# Altium PCB Copy of SoM.PcbDoc (part 7 of 8)
Units mm, origin at the board's own origin, x right, y up, seen from the top; angles counter-clockwise.
Board outline 69.6 x 50 mm, 10 copper layers ([1] Signal HS-H, [2] GND, [3] Signal HS-V, [4] Signal H, [5] GND, [6] POWER, [7] Signal V, [8] Signal HS-H, [9] GND, [10] Signal HS-V), stack 1.146 mm thick; 537 components, 516 nets, 5689 pads, 981 vias.
Unrouted connection lines stored in the file: 963.
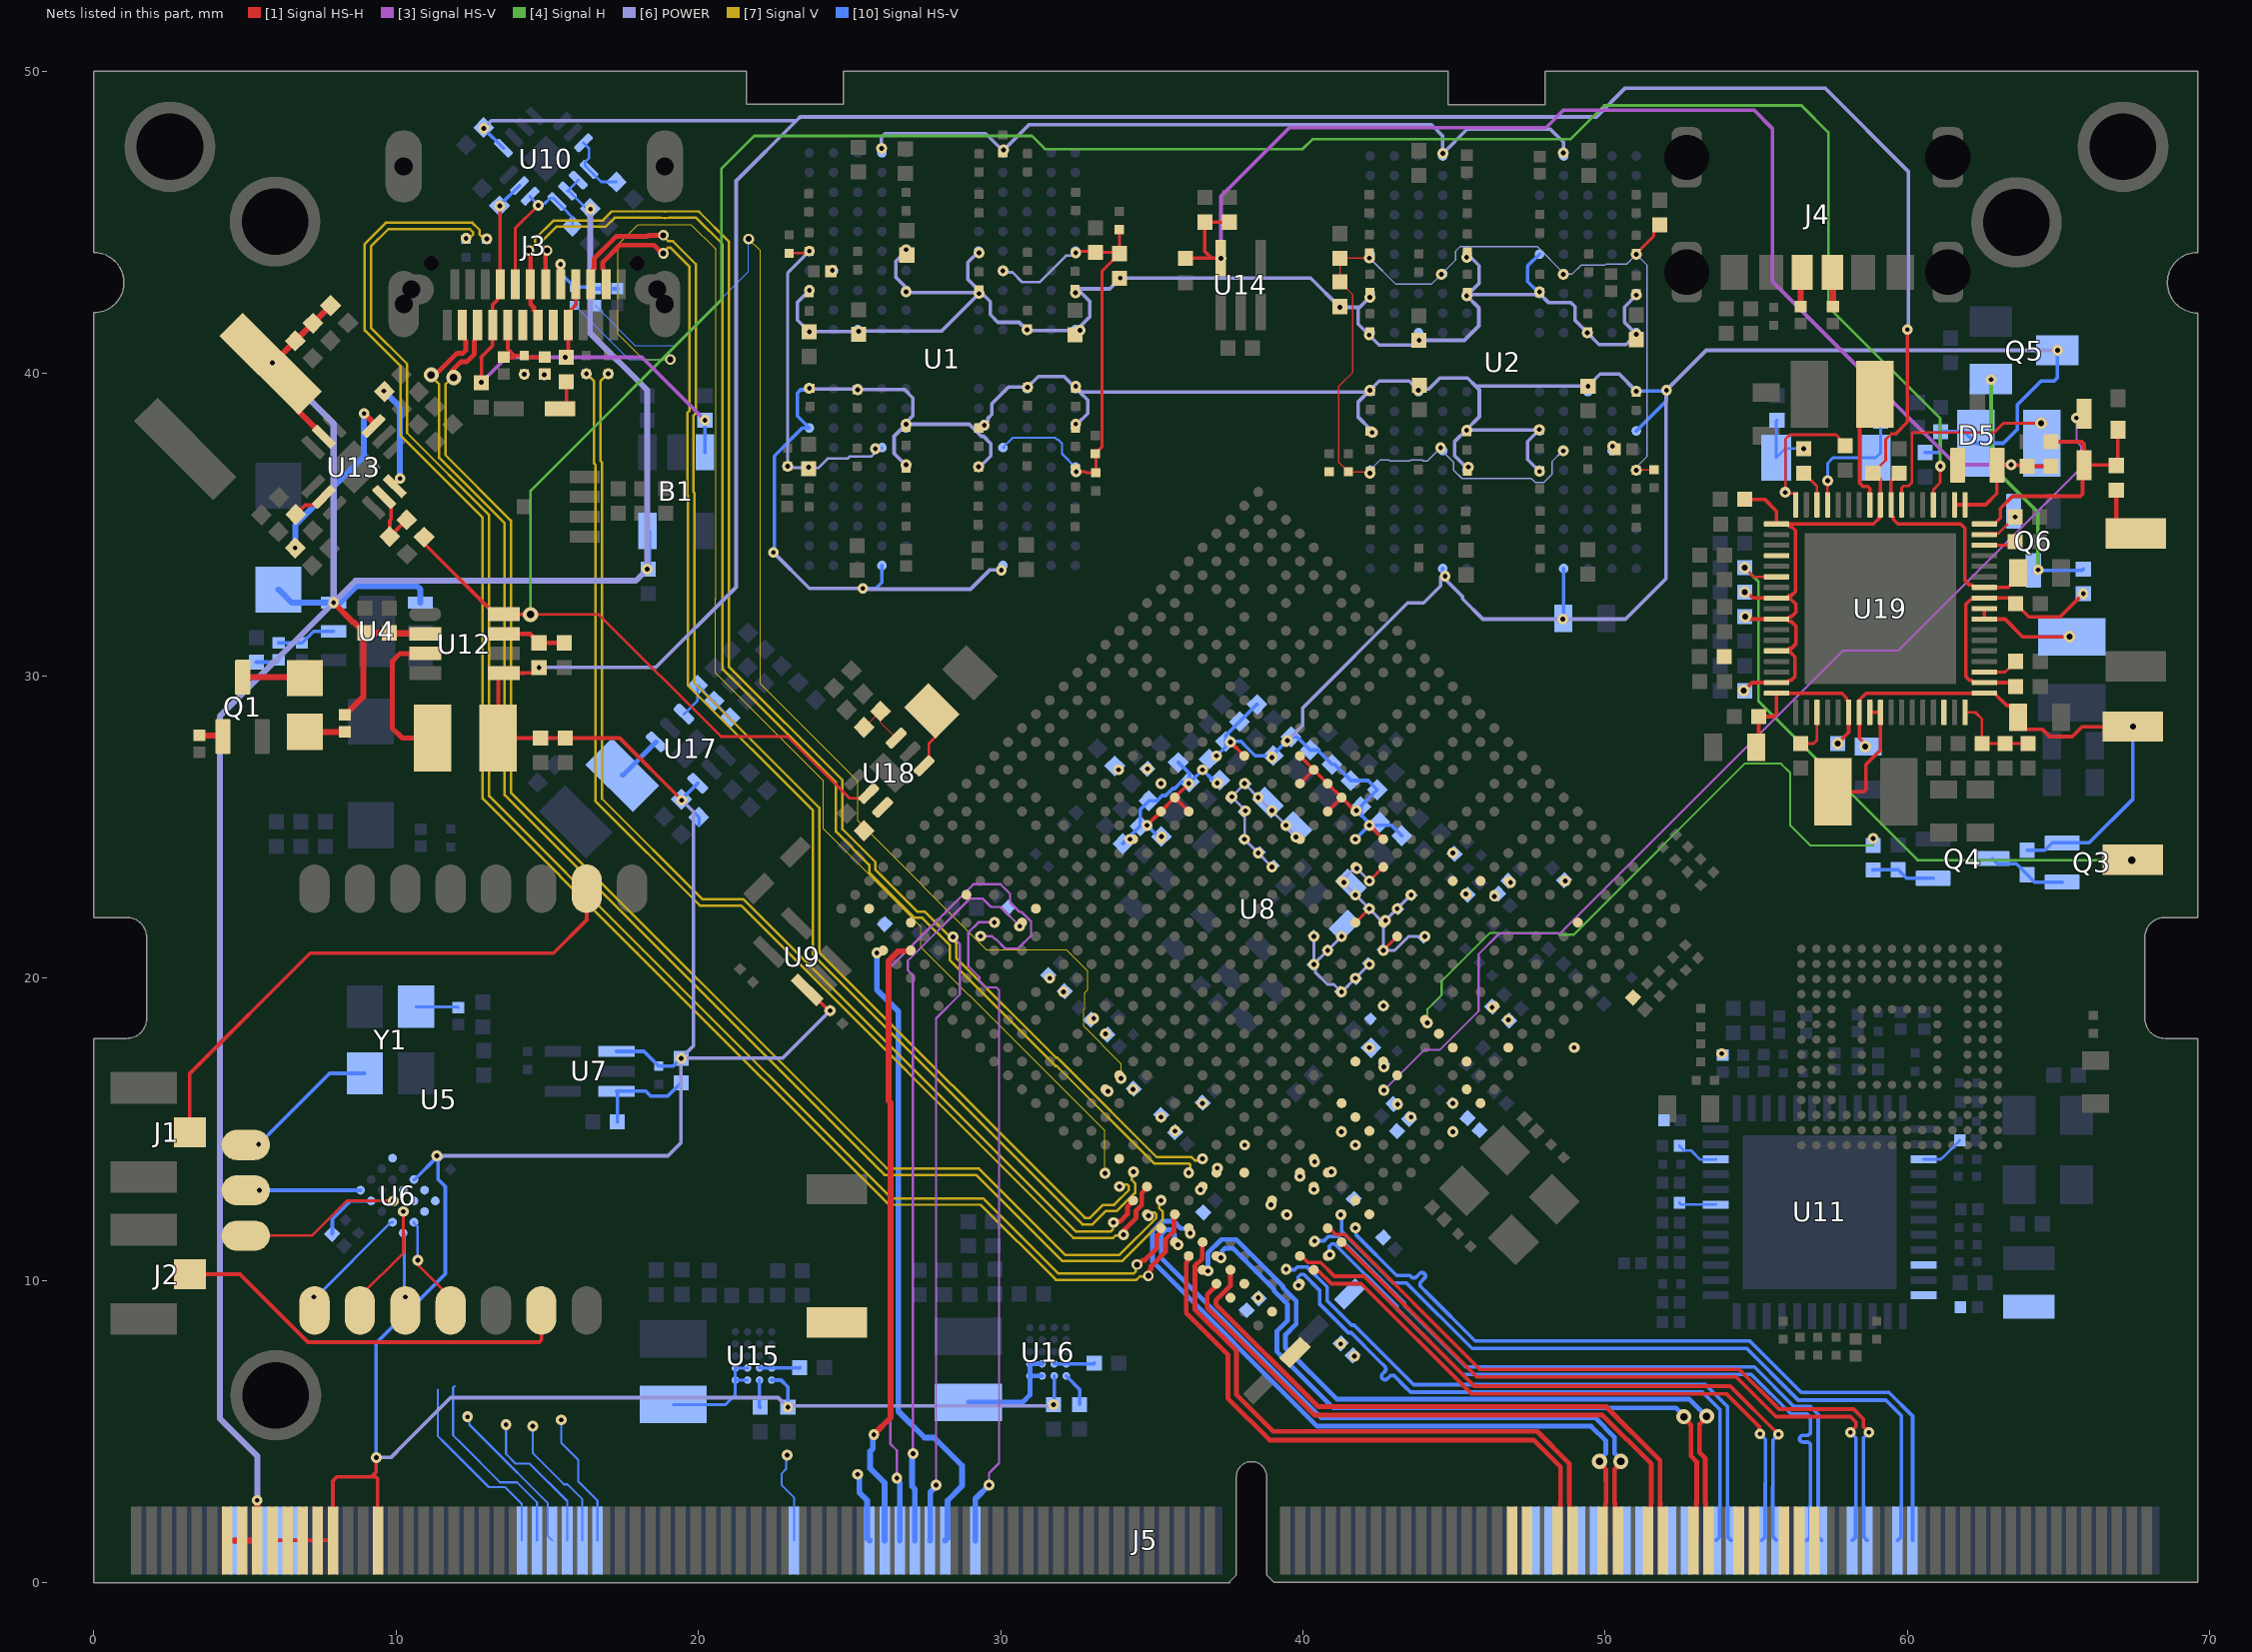
[diagram p12: the nets of this part, all layers, seen from the top]

## Via types
v1: diameter 0.36, hole 0.16, [1] Signal HS-H to [10] Signal HS-V, 895 vias
v2: diameter 0.35, hole 0.16, [1] Signal HS-H to [10] Signal HS-V, 22 vias
v3: diameter 0.4, hole 0.2, [1] Signal HS-H to [10] Signal HS-V, 13 vias
v4: diameter 0.35, hole 0.15, [1] Signal HS-H to [10] Signal HS-V, 12 vias
v5: diameter 0.35, hole 0.15, [1] Signal HS-H to [8] Signal HS-H, 11 vias
v6: diameter 0.35, hole 0.2, [1] Signal HS-H to [8] Signal HS-H, 6 vias
v7: diameter 0.5, hole 0.25, [1] Signal HS-H to [10] Signal HS-V, 6 vias
v8: diameter 0.35, hole 0.15, [3] Signal HS-V to [10] Signal HS-V, 6 vias
v9: diameter 0.35, hole 0.2, [3] Signal HS-V to [10] Signal HS-V, 4 vias
v10: diameter 0.36, hole 0.16, [1] Signal HS-H to [3] Signal HS-V, 4 vias
v11: diameter 0.5, hole 0.25, [1] Signal HS-H to [8] Signal HS-H, 2 vias

## Nets (pads, with @x,y where several pads share a name; then routed paths per layer and width w, separated by ;. In a path a pad name is that pad's centre, name@x,y a point inside that pad or via, vN(x,y) a via of type N, cw(c..) or ccw(c..) an arc to the next point about the centre after c; other vN are vias at no path point) (continued)
NetC328_1: C328.1 U19.37 | length 1.2
  [1] Signal HS-H w0.09: U19.37@62.537,30.124 63.22,30.124 C328.1@63.576,30.48
NetC341_1: C341.1 U19.65 Y4.2 | length 4.3
  [1] Signal HS-H w0.09: U19.65@57.352,35.66 v1(57.353,36.449)
  [10] Signal HS-V w0.09: v1(57.353,36.449) 57.353,37.033 57.531,37.211 Y4.2@58.946,37.211 59.106,37.371 C341.1@59.106,38.43
NetC343_1: C343.1 R123.2 Y4.1 | length 2.3
  [10] Signal HS-V w0.09: C343.1@55.677,38.456 55.65,38.429 Y4.1@55.65,37.211 55.955,37.516 v1(56.566,37.516)
NetD2_K: D2.K R36.1 U8.AK30
  other v1: 38.52,9.427
NetD3_K: D3.K R38.1 U8.AK31
  other v1: 41.25,7.899
NetDS1_A: DS1.A R92.1 | length 1.3
  [1] Signal HS-H w0.2: DS1.A@6.985,28.143 R92.1@8.306,28.143
NetDS1_K: DS1.K Q1.3 | length 2.1
  [1] Signal HS-H w0.2: Q1.3@4.928,29.954 6.952,29.954 DS1.K@6.985,29.921
NetJ1_2: J1.2 U5.9 | length 18.2
  [1] Signal HS-H w0.12: J1.2@3.183,14.897 3.183,16.848 7.163,20.828 15.215,20.828 16.309,21.922 U5.9@16.309,22.955
NetJ2_2: J2.2 U5.6 | length 13.6
  [1] Signal HS-H w0.12: J2.2@3.183,10.203 4.84,10.203 7.088,7.955 14.739,7.955 14.809,8.025 U5.6@14.809,9.005
NetJ4_A5: J4.A5 R101.2 | length 1.1
  [1] Signal HS-H w0.2: J4.A5@57.513,43.35 57.531,43.332 R101.2@57.531,42.215
NetJ4_B5: J4.B5 R102.2 | length 1.2
  [1] Signal HS-H w0.2: R102.2@56.464,42.215 56.464,43.301 J4.B5@56.513,43.35
NetL1_1: L1.1 U11.48
NetL2_1: L2.1 U12.3 | length 4.9
  [1] Signal HS-H w0.16: U12.3@10.968,30.739 10.14,30.739 9.881,30.48 9.881,28.27 10.211,27.94 L2.1@11.204,27.94
NetL4_1: L4.1 U15.D3 U15.D4 U15.E3 U15.E4 | length 3.9
  [10] Signal HS-V w0.1: L4.1@19.176,5.889 20.901,5.889 21.228,6.217 U15.E4@21.228,6.701 ; U15.E3@21.628,6.701 U15.E4@21.228,6.701 ; U15.D3@21.628,7.101 U15.D4@21.228,7.101 U15.E4@21.228,6.701
NetL5_1: L5.1 U16.D3 U16.D4 U16.E3 U16.E4 | length 4
  [10] Signal HS-V w0.16: L5.1@28.931,5.971 30.736,5.971 30.972,6.207 U16.E4@30.972,6.839 ; U16.E3@31.372,6.839 U16.E4@30.972,6.839 ; U16.D3@31.372,7.239 U16.D4@30.972,7.239 U16.E4@30.972,6.839
NetL6_1: L6.1 U17.4 | length 1.6
  [10] Signal HS-V w0.16: L6.1@17.488,26.715 17.506,26.715 U17.4@18.608,27.817
NetL7_1: L7.1 U18.4 | length 2
  [1] Signal HS-H w0.09: U18.4@27.467,27.021 27.626,27.18 27.626,27.762 27.848,27.984 27.848,28.727 L7.1@27.731,28.843
NetL8_1: L8.1 U19.61 | length 4.1
  [1] Signal HS-H w0.12: U19.61@58.752,35.659 58.752,36.196 58.681,36.266 58.524,36.266 58.415,36.376 58.415,38.808 L8.1@58.926,39.319
NetL9_2: L9.2 U19.42 U19.43 | length 3.4
  [1] Signal HS-H w0.12: U19.43@62.537,32.224 U19.42@62.537,31.874 63.224,31.874 63.805,31.293 v3(65.354,31.293)
NetL10_1: L10.1 U19.58 | length 7
  [1] Signal HS-H w0.09: U19.58@59.802,35.659 59.802,36.214 59.869,36.281 60.037,36.281 60.137,36.382 60.137,37.996 60.19,38.049 62.861,38.049 63.166,38.354 v3(64.414,38.354)
NetL11_2: L11.2 U19.25 U19.26 | length 4.2
  [1] Signal HS-H w0.12: L11.2@57.533,26.162 58.553,26.162 58.623,26.232 58.623,27.066 59.102,27.545 U19.26@59.102,28.789 U19.25@58.752,28.789
NetQ1_1: Q1.1 R93.2 | length 0.8
  [1] Signal HS-H w0.2: R93.2@3.506,28.025 4.246,28.025 Q1.1@4.278,27.994
NetQ3_1: Q3.1 Q4.3 R111.2 | length 2.6
  [10] Signal HS-V w0.12: Q4.3@62.804,23.952 62.976,23.78 63.596,23.78 R111.2@63.957,23.419 64.201,23.175 Q3.1@65.111,23.175
NetQ4_1: Q4.1 R113.2 R115.2 | length 2.1
  [10] Signal HS-V w0.12: R113.2@58.861,23.576 58.869,23.584 R115.2@59.686,23.584 59.968,23.302 Q4.1@60.844,23.302
NetQ5_1: Q5.1 Q6.3 R130.2 | length 8.6
  [4] Signal H w0.12: v1(62.763,39.802) 62.763,36.957 64.313,35.408 v1(64.313,33.503)
  [10] Signal HS-V w0.12: Q6.3@64.16,33.488 65.771,33.488 R130.2@65.811,33.528
NetR11_1: R11.1 R12.2 U4.5 | length 2
  [10] Signal HS-V w0.12: R12.2@6.121,31.09 R11.1@6.883,31.09 6.893,31.09 7.274,31.471 U4.5@7.938,31.471
NetR12_1: R12.1 R13.1 | length 0.8
  [10] Signal HS-V w0.12: R13.1@5.385,30.455 6.046,30.455 R12.1@6.121,30.53
NetR14_1: R14.1 Y1.1 | length 1.4
  [10] Signal HS-V w0.09: Y1.1@10.668,19.05 12.04,19.05 R14.1@12.065,19.025
NetR15_2: R15.2 U6.D4 | length 2
  [10] Signal HS-V w0.12: R15.2@7.89,11.541 7.897,11.548 7.897,12.03 8.497,12.63 U6.D4@9.18,12.63
NetR16_1: R16.1 R17.2 U7.3 | length 3.4
  [10] Signal HS-V w0.12: R17.2@17.323,15.24 17.323,16.231 U7.3@17.297,16.256 18.267,16.256 18.428,16.095 18.991,16.095 R16.1@19.431,16.535
NetR24_1: R24.1 U8.V29
  other v1: 43.576,15.402
NetR25_1: R25.1 U8.L28
  other v1: 46.257,19.028
NetR26_2: R26.2 U8.L29
  other v1: 46.793,18.619
NetR28_1: R28.1 U8.AF15
  other v1: 33.464,18.159
NetR29_1: R29.1 U8.G21
  other v1: 44.955,24.135
NetR31_1: R31.1 U8.AF12
  other v1: 32.085,19.538
NetR32_1: R32.1 U8.AG18
  other v1: 34.384,16.321
NetR33_1: R33.1 U8.AE21
  other v1: 36.682,15.861
NetR34_1: R34.1 U8.AG21
  other v1: 35.762,14.942
NetR35_1: R35.1 U8.AG20
  other v1: 35.303,15.402
NetR37_1: R37.1 U8.AC31
NetR39_1: R39.1 U8.AC30
NetR40_1: R40.1 U8.AF14
  other v1: 33.081,18.67
NetR41_1: R41.1 U8.AF11
  other v1: 31.626,19.998
NetR46_1: R46.1 U8.F24
  other v1: 46.869,23.164
NetR49_2: R49.2 U8.H23
  other v1: 45.389,22.781
NetR50_1: R50.1 U8.D26
  other v1: 48.683,23.215
NetR51_2: R51.2 U8.G23
NetR54_1: R54.1 U8.G24
  other v2: 46.334,22.705
NetR55_2: R55.2 U8.H22
  other v1: 53.848,17.501 48.969,17.702
NetR56_1: R56.1 U8.E28
NetR74_2: R74.2 U11.46
NetR75_2: R75.2 U11.39 | length 1.5
  [10] Signal HS-V w0.09: U11.39@60.529,14.007 61.099,14.007 61.163,14.072 61.173,14.072 61.721,14.62 R75.2@61.721,14.63
NetR76_2: R76.2 U11.19 | length 1.2
  [10] Signal HS-V w0.09: R76.2@52.452,12.573 52.517,12.507 U11.19@53.659,12.507
NetR79_2: R79.2 U11.22 | length 1.4
  [10] Signal HS-V w0.09: R79.2@52.452,14.453 52.452,14.443 52.597,14.298 52.835,14.298 53.137,13.995 53.647,13.995 U11.22@53.659,14.007
NetR94_1: R94.1 R95.2 U12.7 | length 2.1
  [1] Signal HS-H w0.16: U12.7@13.568,31.389 14.432,31.389 R94.1@14.732,31.09 R95.2@15.57,31.09
NetR96_1: R96.1 U13.8 | length 1.2
  [1] Signal HS-H w0.12: R96.1@6.688,35.339 6.992,35.643 7.239,35.643 7.511,35.915 U13.8@7.617,35.915
NetR98_1: R98.1 U13.12 | length 3.1
  [10] Signal HS-V w0.2: v1(9.601,39.421) 10.135,38.887 v4(10.135,36.525)
NetR100_2: R100.2 R103.2 U13.11 | length 2.2
  [1] Signal HS-H w0.12: U13.11@9.611,35.915 9.611,35.809 9.841,35.58 9.841,35.175 9.796,35.131 R103.2@9.796,34.603 R100.2@10.355,35.162
NetR104_2: R104.2 U13.3 | length 6
  [1] Signal HS-H w0.2: v4(8.941,38.684) 9.285,38.34 9.285,38.29 U13.3@9.258,38.263
  [10] Signal HS-V w0.2: v4(6.672,34.231) 6.672,34.995 8.941,37.263 v4(8.941,38.684)
NetR110_1: R110.1 R114.2 R118.2 U17.6 | length 2.7
  [10] Signal HS-V w0.09: U17.6@19.527,28.737 19.977,29.186 R110.1@19.977,29.689 20.499,29.166 R114.2@20.521,29.166 20.521,29.135 R118.2@21.048,28.608
NetR112_1: R112.1 R116.2 U18.6 | length 1.9
  [1] Signal HS-H w0.002: R116.2@25.483,28.299 25.497,28.299 R112.1@26.027,28.829 26.027,28.46 U18.6@26.548,27.94
NetR123_1: R123.1 U19.66 | length 1.2
  [1] Signal HS-H w0.09: R123.1@56.566,36.703 57.002,36.267 U19.66@57.002,35.659
NetR127_1: R127.1 R129.1 R131.2 U19.34 | length 3
  [1] Signal HS-H w0.09: U19.34@61.902,28.789 62.122,28.789 62.125,28.792 62.242,28.792 62.459,28.575 R127.1@62.459,27.762 R131.2@63.221,27.762 R129.1@63.984,27.763
NetU19_4: U19.4 U19.32
OTP_OUT_H: R113.1 U8.P26 | length 21.4
  [4] Signal H w0.07: v1(44.12,18.517) 44.12,18.973 44.586,19.439 44.586,19.897 46.177,21.488 48.438,21.488 48.489,21.438 48.959,21.438 54.623,27.102 55.804,27.102 55.829,27.077 56.117,26.789 56.117,25.061 56.79,24.388 58.861,24.388
  [10] Signal HS-V w0.07: R113.1@58.861,24.388 v1@58.861,24.744
  other v1: 58.861,24.617
PCIE_REF_CLK_N: J5.226 U8.AD30 | length 25.8
  [10] Signal HS-V w0.122: v1(41.25,12.167) 41.284,12.132 41.284,11.624 42.999,9.909 43.431,9.909 45.594,7.747 54.675,7.747 56.236,6.187 56.381,6.041 59.282,6.041 59.79,5.533 59.79,2.532 59.779,2.521 59.779,1.511 J5.226@59.665,1.397
PCIE_REF_CLK_P: J5.228 U8.AD31 | length 25.8
  [10] Signal HS-V w0.122: v1(41.732,11.735) 41.764,11.703 41.764,11.497 43.102,10.159 43.534,10.159 43.578,10.116 ccw(c43.664,10.202) 43.751,10.116 43.861,10.225 cw(c43.939,10.147) 44.018,10.068 43.908,9.958 ccw(c43.994,9.872) 43.908,9.785 44.131,9.562 45.697,7.996 54.778,7.996 56.484,6.29 59.385,6.29 60.165,5.51 60.165,4.597 J5.228@60.165,1.397
PCIE_RX0_N: J5.214 U8.AF31 | length 23.3
  [10] Signal HS-V w0.122: v1(40.894,10.846) 40.876,10.863 40.876,11.134 40.948,11.206 41.049,11.206 43.109,9.147 43.109,9.064 45.284,6.889 54.828,6.889 56.138,5.579 56.236,5.579 56.676,5.579 56.79,5.466 56.79,5.279 56.79,4.996 cw(c56.668,4.996) 56.668,4.874 56.541,4.874 ccw(c56.541,4.762) 56.541,4.651 56.668,4.651 cw(c56.668,4.529) 56.79,4.529 56.79,3.961 56.79,2.532 56.779,2.521 56.779,1.511 J5.214@56.665,1.397
PCIE_RX0_P: J5.216 U8.AF30 | length 23.4
  [10] Signal HS-V w0.122: v1(40.386,11.303) 40.394,11.311 40.7,11.311 40.845,11.455 41.153,11.455 43.358,9.25 43.358,9.167 45.387,7.138 54.932,7.138 56.236,5.834 56.241,5.829 56.78,5.829 57.04,5.569 57.04,5.279 57.04,2.532 57.051,2.521 57.051,1.511 J5.216@57.165,1.397
PCIE_RX1_N: J5.202 U8.AH31 | length 21.2
  [10] Signal HS-V w0.122: v1(39.853,9.83) 39.84,9.842 39.84,10.111 39.927,10.198 40.028,10.198 40.549,9.678 40.549,9.224 41.506,8.268 41.593,8.268 42.507,7.353 42.707,7.153 cw(c42.621,7.066) 42.707,6.98 42.632,6.905 ccw(c42.711,6.826) 42.632,6.748 ccw(c42.711,6.826) 42.79,6.748 42.865,6.823 cw(c42.951,6.736) 43.038,6.823 43.373,6.487 43.561,6.299 53.213,6.299 53.79,5.722 53.79,2.532 53.779,2.521 53.779,1.511 J5.202@53.665,1.397
PCIE_RX1_P: J5.204 U8.AH30 | length 21.3
  [10] Signal HS-V w0.122: v1(39.446,10.363) 39.458,10.351 39.728,10.351 39.824,10.447 40.132,10.447 40.798,9.781 40.798,9.328 41.609,8.517 41.696,8.517 43.664,6.549 53.316,6.549 54.04,5.825 54.04,2.532 54.051,2.521 54.051,1.511 J5.204@54.165,1.397
PCIE_RX2_N: J5.190 U8.AC28
  other v1: 40.945,13.589
PCIE_RX2_P: J5.192 U8.AC27
  other v1: 40.386,13.919
PCIE_RX3_N: J5.178 U8.AF28
  other v1: 39.472,12.167
PCIE_RX3_P: J5.180 U8.AF27
  other v1: 38.938,12.497
PCIE_TX0_N: J5.220 U8.AE31 | length 23.6
  [1] Signal HS-H w0.122: U8.AE31@41.278,11.265 41.29,11.265 45.748,6.807 54.331,6.807 55.646,5.492 56.236,5.492 58.109,5.492 58.29,5.31 58.29,5.164 58.115,4.989 v4(58.115,4.978)
  [10] Signal HS-V w0.122: v4(58.115,4.978) 58.115,4.968 58.29,4.793 58.29,3.12 58.29,2.532 58.279,2.521 58.279,1.511 J5.220@58.165,1.397
PCIE_TX0_P: J5.222 U8.AE30 | length 24.5
  [1] Signal HS-H w0.122: U8.AE30@40.818,11.725 40.874,11.725 41.085,11.514 41.394,11.514 45.852,7.057 54.434,7.057 55.75,5.741 56.236,5.741 58.212,5.741 58.54,5.413 58.54,5.164 58.715,4.989 v4(58.715,4.978)
  [10] Signal HS-V w0.122: J5.222@58.665,1.397 58.551,1.511 58.551,2.521 58.54,2.532 58.54,3.223 58.54,4.793 58.715,4.968 v4(58.715,4.978)
PCIE_TX1_N: J5.208 U8.AG31 | length 20.8
  [1] Signal HS-H w0.122: U8.AG31@40.359,10.346 40.398,10.306 40.522,10.306 40.937,9.891 41.925,9.891 45.568,6.248 54,6.248 55.088,5.16 55.088,4.957 v4(55.118,4.928)
  [10] Signal HS-V w0.122: v4(55.118,4.928) 55.118,4.922 55.298,4.742 55.298,3.285 55.29,3.277 55.29,2.532 55.279,2.521 55.279,1.511 J5.208@55.165,1.397
PCIE_TX1_P: J5.210 U8.AG30 | length 21.9
  [1] Signal HS-H w0.122: U8.AG30@39.899,10.806 39.955,10.806 40.166,10.595 40.586,10.595 41.041,10.14 42.028,10.14 45.671,6.498 54.132,6.498 v4(55.728,4.902)
  [10] Signal HS-V w0.122: J5.210@55.665,1.397 55.551,1.511 55.551,2.521 55.54,2.532 55.54,3.173 55.547,3.181 55.547,4.717 55.728,4.897 v4(55.728,4.902)
PCIE_TX2_N: J5.196 U8.AA28
  other v1: 41.732,14.478
PCIE_TX2_P: J5.198 U8.AA27
  other v1: 41.275,14.91
PCIE_TX3_N: J5.184 U8.AD28
  other v1: 40.361,13.005
PCIE_TX3_P: J5.186 U8.AD27
  other v1: 39.903,13.437
PMIC_EXT_EN: R100.1 U12.8 U18.2 U19.55 | length 88
  [1] Signal HS-H w0.09: v7(14.453,32.029) 16.713,32.029 20.752,27.991 22.963,27.991 25.004,25.949 25.476,25.949 U18.2@25.635,26.108 ; U19.55@60.852,35.659 60.852,36.163 61.077,36.388 v5(61.077,36.933)
  [1] Signal HS-H w0.12: R100.1@10.93,34.587 10.93,34.377 13.268,32.039 U12.8@13.568,32.039 13.578,32.029 v7(14.453,32.029)
  [4] Signal H w0.09: v7(14.453,32.029) 14.453,36.128 20.77,42.445 20.77,46.779 21.847,47.857 31.033,47.857 31.466,47.424 39.991,47.424 40.317,47.75 48.842,47.75 49.962,48.87 56.49,48.87 57.379,47.981 57.379,42.212 61.087,38.503 61.077,38.494 v5(61.077,36.933)
PMIC_INT_L: C344.2 U8.M30 U19.49 | length 1.1
  [1] Signal HS-H w0.09: U19.49@62.537,34.324 63.432,34.324 C344.2@63.551,34.442
PMIC_SLEEP_H: C345.2 Q6.1 U8.R30 U19.50 | length 1.3
  [1] Signal HS-H w0.09: U19.50@62.537,34.674 62.577,34.714 63.009,34.714 v1(63.551,35.255)
PWM0_BL: J5.88 U8.AF5 | length 3.1
  [10] Signal HS-V w0.07: v1(22.936,4.216) 22.904,4.184 22.904,3.756 22.76,3.612 22.76,3.224 23.165,2.819 J5.88@23.165,1.397
PWR_KEY: J5.14 R128.1 SW3.2 | length 1.8
  [1] Signal HS-H w0.16: R128.1@66.904,36.144 66.904,35.133 67.324,34.713 SW3.2@67.548,34.713
PWR_KEY_L: D6.A U8.V27 | length 34.7
  [1] Signal HS-H w0.12: v5(65.586,38.532) 65.698,38.532 D6.A@65.837,38.671
  [3] Signal HS-V w0.07: v1(42.672,16.281) 44.01,17.62 44.517,17.62 45.809,18.912 45.809,20.789 46.496,21.475 48.501,21.475 57.861,30.836 59.69,30.836 65.735,36.881 65.735,37.6 65.586,37.75 v5(65.586,38.532)
PWROM: D6.K D7.K R125.1 R128.2 U19.51 | length 8.9
  [1] Signal HS-H w0.12: U19.51@62.537,35.024 62.872,35.024 63.066,35.218 63.066,35.535 63.472,35.941 65.716,35.941 65.786,36.011 65.786,36.92 D6.K@65.837,36.971 ; R125.1@64.745,37.744 65.761,37.744 65.837,37.668 D6.K@65.837,36.971 ; D7.K@66.954,38.138 66.954,37.008 R128.2@66.904,36.957 66.89,36.971 D6.K@65.837,36.971
R7_U8E: R19.2 U8.R7
  other v1: 34.854,26.925
R8_U8E: FB3.1 U8.R8
  other v1: 35.303,26.433 33.902,26.891
R24_RK3399: C181.2 C182.2 FB7.1 U8.R24 U8.U25
  other v1: 42.197,17.7 42.657,19.079
RECOVERY: J5.20 R27.2 SW2.2
RESET_IN_H: C346.2 J5.22 Q3.3 SW1.2 U19.6 | length 20.3
  [1] Signal HS-H w0.09: v3(54.61,33.572) 54.909,33.274 U19.6@55.667,33.274
  [4] Signal H w0.09: v3(54.61,33.572) 55.067,33.115 55.067,29.159 60.325,23.901 v7(67.412,23.901)
RespWROM: R22.1 R124.1 U19.20 | length 1.5
  [1] Signal HS-H w0.09: R124.1@56.464,27.762 56.896,27.762 57.002,27.868 U19.20@57.002,28.789
RTC_BATT_IN: D5.A1 J5.18
RTC_CLKO_SOC: R126.1 U8.U31 U19.68 | length 4.7
  [1] Signal HS-H w0.09: U19.68@56.302,35.659 56.302,35.994 56.262,36.034 55.99,36.034 v1(55.956,36.068) 55.956,37.821 56.109,37.973 57.633,37.973 R126.1@57.988,37.617
  other v1: 44.958,14.91
RTC_CLKO_WIFI: U5.16 Y1.3 | length 4.5
  [10] Signal HS-V w0.12: v1(5.461,14.503) 7.808,16.85 Y1.3@8.968,16.85
SBU1: C242.2 J3.A8 R65.2 R68.2 | length 2.4
  [1] Signal HS-H w0.12: R65.2@13.568,40.539 13.912,40.539 ; J3.A8@13.7,41.6 13.7,40.806 13.912,40.594 ; 13.942,40.594 C242.2@14.187,40.594 ; C242.2@14.242,40.594 14.242,40.539 R68.2@14.92,40.539
SBU2: C244.2 J3.B8 R66.2 R67.2 | length 2.4
  [10] Signal HS-V w0.12: v1(15.443,43.612) 15.489,43.566 15.489,43.275 C244.2@15.906,42.859 16.531,42.859 R67.2@16.586,42.804 R66.2@17.323,42.804
SDIO0_CLK: J5.112 U8.AF7 | length 23.2
  [3] Signal HS-V w0.077: v1(29.616,3.226) 29.616,3.626 29.947,3.956 29.947,19.604 29.858,19.693 29.513,19.693 29.294,19.912 29.294,20.032 28.931,20.396 28.931,21.507 29.267,21.844 v10(29.794,21.844)
  [10] Signal HS-V w0.191: 29.165,2.544 J5.112@29.165,1.397 29.162,1.4 29.162,2.772 v1(29.616,3.226)
SDIO0_CMD: J5.106 U8.AH6 | length 20.5
  [3] Signal HS-V w0.077: v1(27.864,3.226) 27.864,18.663 28.651,19.45 28.651,21.133 v10(28.423,21.361)
  [10] Signal HS-V w0.191: J5.106@27.665,1.397 27.676,1.408 27.676,2.992 27.864,3.18 v1(27.864,3.226)
SDIO0_D0: J5.98 U8.AD8 | length 2.3
  [10] Signal HS-V w0.191: v1(25.273,3.581) 25.327,3.527 25.327,2.983 25.586,2.725 25.586,1.476 J5.98@25.665,1.397
SDIO0_D1: J5.100 U8.AK5 | length 20.6
  [1] Signal HS-H w0.191: v1(25.806,4.902) 26.365,5.461 26.365,15.875 26.291,15.949 26.291,20.561 26.62,20.891 27.003,20.891 U8.AK5@27.03,20.917
  [10] Signal HS-V w0.191: v1(25.806,4.902) 25.777,4.873 25.777,4.435 25.683,4.341 25.683,3.781 26.165,3.299 J5.100@26.165,1.397
SDIO0_D2: J5.102 U8.AG7 | length 28
  [3] Signal HS-V w0.077: v1(26.568,3.454) 26.568,4.377 26.348,4.597 26.348,20.354 29.095,23.101 30.005,23.101 30.31,22.795 30.31,22.502 30.626,22.187 30.69,22.187 31.005,21.871 31.005,21.404 30.582,20.98 30.15,20.98 29.845,21.285 29.82,21.285 29.718,21.387 v10(29.337,21.387)
  [10] Signal HS-V w0.191: v1(26.568,3.454) 26.568,3.409 26.665,3.312 J5.102@26.665,1.397
SDIO0_D3: J5.104 U8.AE8 | length 24.2
  [3] Signal HS-V w0.077: v1(27.102,4.267) 27.102,20.085 26.932,20.255 26.932,20.576 28.987,22.631 29.407,22.631 29.683,22.355 29.994,22.355 v10(30.632,21.717)
  [10] Signal HS-V w0.191: v1(27.102,4.267) 27.102,4.222 27.069,4.189 27.069,3.195 27.165,3.099 J5.104@27.165,1.397
SDIO0_DETN: J5.108 U8.AL4 | length 21
  [10] Signal HS-V w0.191: v1(25.908,20.828) 25.908,19.609 26.619,18.898 26.619,5.664 27.483,4.801 27.798,4.801 28.727,3.872 28.727,3.2 28.244,2.717 28.244,1.476 J5.108@28.165,1.397
SDIO_CLK: U5.17 U6.E4 | length 3.3
  [10] Signal HS-V w0.12: v1(5.486,12.979) 5.489,12.982 8.824,12.982 U6.E4@8.826,12.984
SDIO_CMD: U5.4 U6.A3 | length 3.4
  [1] Signal HS-H w0.09: v1(10.719,10.668) 10.719,10.516 11.809,9.425 U5.4@11.809,9.005
  [10] Signal HS-V w0.09: U6.A3@10.594,11.923 10.594,11.895 10.719,11.77 v1(10.719,10.668)
SDIO_D0: U5.3 U6.A4 | length 2.2
  [10] Signal HS-V w0.09: U6.A4@10.241,11.57 10.276,11.534 10.276,9.485 v1(10.312,9.449)
SDIO_D1: U5.2 U6.B3 | length 3.9
  [1] Signal HS-H w0.09: U5.2@8.809,9.005 8.809,9.469 10.241,10.901 v1(10.241,12.277)
SDIO_D2: U5.1 U6.B4 | length 3.6
  [10] Signal HS-V w0.09: v1(7.29,9.449) 7.359,9.449 9.833,11.923 U6.B4@9.887,11.923
SDIO_D3: U5.18 U6.C3 | length 5.4
  [1] Signal HS-H w0.09: U5.18@5.034,11.48 7.223,11.48 8.373,12.63 v2(9.912,12.63)
SDMMC0_CLK: R24.2 U6.E1
SDMMC0_CMD: U6.A2 U8.V25
SDMMC0_D0: U6.A1 U8.Y27
SDMMC0_D1: U6.B2 U8.Y26
SDMMC0_D2: U6.B1 U8.Y28
SDMMC0_D3: U6.C2 U8.U27
SDMMC0_DET_L: R18.1 U8.V28
  other v1: 43.129,15.824
SDMMC0_VDDPST: C189.2 U8.U26
  other v1: 42.672,17.069
SPI1_CLK: J5.62 U8.P28 | length 4.5
  [10] Signal HS-V w0.07: v1(15.469,5.385) 15.469,4.626 16.031,4.064 16.031,3.349 16.665,2.715 J5.62@16.665,1.397
SPI1_CSn0: J5.56 U8.P29 | length 5.2
  [10] Signal HS-V w0.07: v1(12.37,5.486) 12.425,5.431 12.425,5.227 13.055,4.597 15.025,2.627 15.025,1.537 J5.56@15.165,1.397
SPI1_RXD/UART4_RX: J5.60 U8.P27 | length 4.5
  [10] Signal HS-V w0.07: v1(14.529,5.182) 14.529,4.282 15.559,3.251 15.672,3.251 16.165,2.758 J5.60@16.165,1.397
SPI1_TXD/UART4_TX: J5.58 U8.R31 | length 4.9
  [10] Signal HS-V w0.07: v1(13.64,5.232) 13.64,4.597 13.64,4.256 13.956,3.941 14.424,3.941 15.665,2.699 J5.58@15.665,1.397
T2_U1: R2.2 U1.T2
  other v1: 24.435,43.409
T2_U2: R6.2 U2.T2
  other v1: 50.241,37.592
T30_RK3399: C178.2 R22.2 U8.T30
  other v1: 44.955,15.861
TYPEC0_D_N: J3.A7 J3.B7 U8.AH23 | length 46.2
  [1] Signal HS-H w0.159: J3.B7@14.95,42.95 14.95,44.019 v6(15,44.069)
  [7] Signal V w0.082: v6(15,44.069) 14.804,44.265 14.804,44.358 15.303,44.857 16.932,44.857 17.23,45.155 18.752,45.155 ccw(c18.895,46.25) 19.039,45.155 19.929,45.155 19.953,45.132 20.803,44.282 20.803,30.22 24.556,26.467 24.556,24.844 25.655,23.745 25.655,23.495 26.201,22.95 27.155,21.995 27.405,21.995 28.323,21.077 28.323,20.585 31.813,17.094 31.852,17.094 31.941,17.005 35.077,13.869 36.228,13.869 36.276,13.821 36.276,13.753 36.275,13.752 36.275,13.616 v1(36.222,13.563)
TYPEC0_D_P: J3.A6 J3.B6 U8.AG23 | length 48.2
  [1] Signal HS-H w0.159: v6(14.4,44.069) 14.45,44.019 J3.B6@14.45,42.95 14.45,42.292 14.556,42.185 14.556,42.094 14.7,41.95 J3.A6@14.7,41.6
  [7] Signal V w0.082: v6(14.4,44.069) 14.596,44.265 14.596,44.445 15.216,45.066 16.845,45.066 17.144,45.364 18.766,45.364 ccw(c18.895,46.25) 19.025,45.364 20.015,45.364 20.039,45.34 21.012,44.368 21.012,30.307 24.765,26.553 24.765,24.93 25.864,23.831 25.864,23.582 26.262,23.184 27.242,22.204 27.492,22.204 28.532,21.163 28.532,20.671 31.832,17.37 31.871,17.37 31.999,17.242 32.15,17.091 35.163,14.078 36.315,14.078 36.424,13.968 36.492,13.968 36.493,13.97 36.628,13.97 v1(36.682,14.023)
TYPEC0_RX1_N: J3.B10 U8.AL21 | length 44.3
  [1] Signal HS-H w0.159: J3.B10@16.45,42.95 16.521,43.021 16.521,43.427 16.557,43.464 16.557,43.806 17.283,44.533 18.313,44.533 18.356,44.575 v6(18.847,44.575)
  [7] Signal V w0.082: v6(18.847,44.575) 18.847,44.537 19.005,44.379 19.159,44.379 19.919,43.619 19.919,38.685 19.844,38.61 19.844,36.079 19.869,36.055 19.869,29.769 24.003,25.634 24.003,20.853 32.791,12.065 32.952,12.065 33.383,12.496 33.753,12.496 34.237,12.981 34.237,13.126 34.189,13.174 34.121,13.174 34.107,13.16 33.988,13.16 v1(33.934,13.106)
TYPEC0_RX1_P: J3.B11 U8.AK21 | length 44.4
  [1] Signal HS-H w0.159: J3.B11@16.95,42.95 16.879,43.021 16.879,43.427 16.843,43.464 16.843,43.688 17.402,44.247 18.535,44.247 18.807,43.975 v6(18.847,43.975)
  [7] Signal V w0.082: v6(18.847,43.975) 18.847,44.013 19.005,44.17 19.072,44.17 19.71,43.532 19.71,38.771 19.635,38.697 19.635,35.992 19.66,35.968 19.66,29.682 23.794,25.548 23.794,20.767 32.705,11.856 33.038,11.856 33.47,12.288 33.839,12.288 34.446,12.894 34.446,13.212 34.337,13.321 34.337,13.389 34.338,13.391 34.338,13.536 v1(34.392,13.589)
TYPEC0_RX2_N: J3.A10 U8.AL23 | length 45.7
  [1] Signal HS-H w0.159: v11(11.91,39.869) 11.905,39.874 11.871,39.874 11.867,39.878 11.836,39.878 11.836,40.084 12.139,40.386 12.332,40.386 12.593,40.647 12.593,41.086 12.629,41.123 12.629,41.529 J3.A10@12.7,41.6
  [7] Signal V w0.082: v11(11.91,39.869) 11.866,39.869 11.642,39.645 11.642,37.298 13.802,35.137 13.802,26.142 26.244,13.701 29.276,13.701 29.337,13.64 32.134,10.843 33.93,10.843 35.146,12.059 35.146,12.193 35.098,12.241 35.03,12.241 35.026,12.238 34.896,12.238 v1@34.843,12.184
  other v1: 34.894,12.134
TYPEC0_RX2_P: J3.A11 U8.AK23 | length 46.9
  [1] Signal HS-H w0.159: v11(11.165,39.957) 11.086,39.878 11.227,39.878 12.021,40.672 12.214,40.672 12.307,40.765 12.307,41.086 12.271,41.123 12.271,41.529 J3.A11@12.2,41.6
  [7] Signal V w0.082: v11(11.165,39.957) 11.165,39.913 11.433,39.645 11.433,37.211 13.593,35.051 13.593,26.056 26.157,13.492 29.189,13.492 32.047,10.634 34.016,10.634 35.355,11.972 35.355,12.28 35.246,12.389 35.246,12.457 35.25,12.461 35.25,12.591 v1(35.303,12.644)
TYPEC0_SBU1_DC_N: R67.1 U8.AG17 | length 42.2
  [7] Signal V w0.007: v9(21.666,44.45) 22.049,44.067 22.049,29.741 25.273,26.518 25.273,25.4 25.273,25.197 29.54,20.93 32.182,20.93 32.883,20.229 32.883,19.614 32.788,19.52 32.788,18.996 32.743,18.951 32.743,18.403 33.985,17.161 v1(33.985,16.688)
  [10] Signal HS-V w0.037: R67.1@16.586,42.244 16.596,42.244 17.912,40.928 19.215,40.928 21.666,43.379 v9(21.666,44.45)
TYPEC0_SBU1_DC_P: R68.1 U8.AH17
  other v1: 33.553,16.256 14.91,39.954
TYPEC0_SBU1_N: C244.1 U8.AL20 | length 48.7
  [7] Signal V w0.007: v9(19.075,40.462) 18.186,40.462 17.348,41.3 17.348,44.272 18.009,44.933 19.761,44.933 20.582,44.112 20.582,32.548 20.574,32.54 20.574,30.099 24.138,26.535 24.138,24.935 27.367,21.706 27.367,21.025 28.953,19.439 28.969,19.439 33.452,14.956 v1(33.452,13.538)
  [10] Signal HS-V w0.037: C244.1@15.906,42.259 17.702,40.462 v9(19.075,40.462)
TYPEC0_SBU1_P: C242.1 U8.AK20
  other v1: 14.249,39.98
TYPEC0_TX1_N: C237.1 U8.AK22 | length 39.7
  [1] Signal HS-H w0.159: v1(34.061,11.506) 34.1,11.545 34.1,11.69 34.481,12.071 34.481,12.305 34.669,12.494 34.669,12.883 34.843,13.057 U8.AK22@34.843,13.104
  [7] Signal V w0.082: v1(16.3,39.994) 16.555,39.74 16.555,37.026 16.606,36.975 16.606,25.847 20.056,22.397 21.415,22.397 32.411,11.401 33.721,11.401 33.812,11.491 34.047,11.491 v1(34.061,11.506)
TYPEC0_TX1_P: C238.1 U8.AL22 | length 38.4
  [1] Signal HS-H w0.159: v1(33.731,11.913) 33.77,11.951 33.957,11.951 34.195,12.189 34.195,12.423 34.384,12.612 U8.AL22@34.384,12.644
  [7] Signal V w0.082: v1(17.018,39.994) 16.764,39.74 16.764,37.113 16.814,37.062 16.814,25.934 20.142,22.606 21.501,22.606 32.498,11.61 33.635,11.61 33.702,11.677 33.702,11.884 v1(33.731,11.913)
TYPEC0_TX2_N: C239.1 U8.AK24 | length 55.7
  [1] Signal HS-H w0.159: v6(34.885,10.149) 34.922,10.185 34.922,10.321 34.975,10.373 34.975,10.466 35.451,10.943 35.451,11.347 35.738,11.634 35.738,12.16 U8.AK24@35.762,12.184
  [7] Signal V w0.082: v1(13.005,44.45) 12.93,44.45 12.83,44.549 12.814,44.549 12.766,44.597 12.766,44.752 12.531,44.987 9.665,44.987 8.966,44.288 8.966,41.427 10.16,40.234 10.16,37.946 12.872,35.233 12.872,25.936 17.969,20.839 26.307,12.501 29.342,12.501 31.827,10.016 34.49,10.016 34.601,10.128 34.864,10.128 v6(34.885,10.149)
TYPEC0_TX2_P: C240.1 U8.AL24 | length 53.6
  [1] Signal HS-H w0.159: v6(34.511,10.523) 34.563,10.523 34.708,10.668 34.773,10.668 35.166,11.061 35.166,11.466 35.27,11.57 35.27,11.692 U8.AL24@35.303,11.725
  [7] Signal V w0.082: v1(12.319,44.475) 12.372,44.529 12.489,44.529 12.557,44.597 12.557,44.665 12.444,44.778 9.752,44.778 9.175,44.202 9.175,41.514 10.369,40.32 10.369,38.032 13.081,35.32 13.081,26.022 18.178,20.925 26.393,12.71 29.428,12.71 29.489,12.649 31.914,10.225 34.403,10.225 34.477,10.299 34.477,10.489 v6(34.511,10.523)
TYPEC0_U2VBUSDET: D4.K R36.2 R63.1 | length 1
  [1] Signal HS-H w0.12: D4.K@15.43,38.837 15.453,38.837 15.638,39.022 R63.1@15.638,39.726
TYPEC1_D_N: J5.177 U8.AH24
  other v1: 36.605,13.002
TYPEC1_D_P: J5.175 U8.AG24
  other v1: 37.167,13.716
TYPEC1_RX1_N: J5.189 U8.AL25 | length 22.7
  [1] Signal HS-H w0.159: J5.189@50.415,1.397 50.319,1.493 50.319,2.629 50.308,2.641 50.308,3.468 50.304,3.472 50.304,3.75 50.512,3.958 v7(50.512,4.013)
  [10] Signal HS-V w0.159: v1@35.763,11.252 35.754,11.262 35.754,11.517 35.6,11.67 35.469,11.67 35.31,11.512 35.31,10.74 40.589,5.461 49.655,5.461 50.304,4.812 50.304,4.277 50.512,4.068 v7(50.512,4.013)
  other v1: 35.865,11.176
TYPEC1_RX1_P: J5.187 U8.AK25 | length 23.4
  [1] Signal HS-H w0.159: v7(49.809,4.013) 49.809,3.958 50.018,3.75 50.018,3.354 50.022,3.349 50.022,2.641 50.011,2.629 50.011,1.493 J5.187@49.915,1.397
  [10] Signal HS-V w0.159: v1@36.23,11.7 36.22,11.709 36.211,11.719 35.956,11.719 35.719,11.956 35.35,11.956 35.025,11.63 35.025,10.622 40.471,5.175 49.536,5.175 50.018,4.694 50.018,4.277 49.809,4.068 v7(49.809,4.013)
  other v1: 36.271,11.557
TYPEC1_RX2_N: J5.201 U8.AL27 | length 25.5
  [1] Signal HS-H w0.159: v7(53.35,5.505) 53.35,5.474 53.118,5.242 53.118,4.306 53.308,4.116 53.308,2.641 53.319,2.629 53.319,1.493 J5.201@53.415,1.397
  [10] Signal HS-V w0.159: v1(36.855,10.312) 36.855,10.904 37.305,11.354 37.793,11.354 39.334,9.813 39.334,9.764 39.774,9.323 39.774,8.552 39.421,8.199 39.421,7.772 41.125,6.069 52.787,6.069 v7(53.35,5.505)
TYPEC1_RX2_P: J5.199 U8.AK27 | length 23.6
  [1] Signal HS-H w0.159: v7(52.6,5.486) 52.6,5.455 52.832,5.223 52.832,4.188 53.022,3.998 53.022,2.641 53.011,2.629 53.011,1.493 J5.199@52.915,1.397
  [10] Signal HS-V w0.159: v1(37.287,10.744) 37.326,10.783 37.326,10.971 37.423,11.068 37.675,11.068 39.048,9.694 39.048,9.646 39.489,9.205 39.489,8.671 39.135,8.317 39.135,7.654 41.006,5.783 52.338,5.783 52.6,5.521 v7(52.6,5.486)
TYPEC1_SBU1: J5.205 U8.AK29
TYPEC1_SBU1_DC: J5.211 U8.AE24
  other v1: 38.075,14.478
TYPEC1_SBU2: J5.207 U8.AL29
TYPEC1_SBU2_DC: J5.213 U8.AF25
TYPEC1_TX1_N: J5.183 U8.AK26 | length 20.3
  [1] Signal HS-H w0.159: U8.AK26@36.682,11.265 36.666,11.249 36.666,10.707 36.427,10.469 36.427,9.036 37.802,7.662 37.802,6.217 39.015,5.003 47.753,5.003 48.808,3.948 48.808,2.641 48.819,2.629 48.819,1.493 J5.183@48.915,1.397
TYPEC1_TX1_P: J5.181 U8.AL26 | length 19.7
  [1] Signal HS-H w0.159: U8.AL26@36.222,10.806 36.189,10.773 36.189,10.635 36.142,10.587 36.142,8.918 37.516,7.544 37.516,6.098 38.897,4.717 47.634,4.717 48.522,3.83 48.522,2.641 48.511,2.629 48.511,1.493 J5.181@48.415,1.397
TYPEC1_TX2_N: J5.195 U8.AK28 | length 20.9
  [1] Signal HS-H w0.159: U8.AK28@37.601,10.346 37.601,9.816 37.122,9.337 37.122,9.205 40.504,5.823 50.029,5.823 51.808,4.044 51.808,2.641 51.819,2.629 51.819,1.493 J5.195@51.915,1.397
TYPEC1_TX2_P: J5.193 U8.AL28 | length 20.3
  [1] Signal HS-H w0.159: U8.AL28@37.141,9.886 37.141,9.84 36.836,9.535 36.836,9.087 40.386,5.537 49.911,5.537 51.522,3.926 51.522,2.641 51.511,2.629 51.511,1.493 J5.193@51.415,1.397
TYPEC1_U2VBUSDET: J5.215 R38.2
  other v1: 41.707,7.493
TYPEC_CC1: C235.2 J3.A5 U10.10 U10.11 | length 2.1
  [10] Signal HS-V w0.09: U10.10@16.207,47.632 16.384,47.456 16.384,47.123 16.255,46.995 16.255,46.877 U10.11@16.384,46.748 16.794,46.338 C235.2@17.289,46.338
TYPEC_CC2: C236.2 J3.B5 U10.1 U10.14 | length 5.1
  [1] Signal HS-H w0.09: J3.B5@13.95,42.95 13.95,44.811 v1(14.707,45.568)
  [10] Signal HS-V w0.09: U10.1@14.439,45.865 14.439,45.835 v1(14.707,45.568) 14.758,45.619 14.915,45.619 15.094,45.798 15.212,45.798 U10.14@15.323,45.688 15.686,45.324 15.686,45.314 15.835,45.165 C236.2@15.835,44.875
UART2DBG_RX: J5.54 U8.AK2 | length 6.6
  [10] Signal HS-V w0.07: 11.938,6.502 11.887,6.452 11.887,4.877 12.167,4.597 13.444,3.32 14.003,3.32 14.665,2.658 J5.54@14.665,1.397
UART2DBG_TX: J5.52 U8.AJ4 | length 6.4
  [10] Signal HS-V w0.07: 11.379,6.375 11.379,4.851 11.633,4.597 13.071,3.16 13.604,3.16 14.165,2.599 J5.52@14.165,1.397
VBUS_TYPEC: B1.3 C231.2 C232.2 C241.2 J3.A4 J3.A9 J3.B4 J3.B9 R63.2 U10.2 | length 19.3
  [1] Signal HS-H w0.12: C231.2@12.818,39.7 v1(12.827,39.709) 12.827,40.529 12.818,40.538 13.2,40.92 J3.A9@13.2,41.6 ; J3.A9@13.2,41.6 13.2,42.28 13.36,42.44 13.36,42.86 J3.B4@13.45,42.95 13.443,42.957 13.443,45.536 v1(13.437,45.542) ; R63.2@15.638,40.538 15.7,40.6 J3.A4@15.7,41.6 15.79,41.69 15.79,42.11 15.95,42.27 J3.B9@15.95,42.95
  [3] Signal HS-V w0.12: v1(12.827,39.709) 13.656,40.538 18.136,40.538 v1(20.219,38.455)
  [10] Signal HS-V w0.12: C232.2@13.428,45.549 13.428,45.561 U10.2@14.085,46.218 ; v1(20.219,38.455) v1(20.219,38.455) B1.3@20.219,37.393
  other v1: 15.596,40.538
VCC: R47.2 R48.2
VCC1V8_LPDDR4_A: C37.2 C38.2 C39.2 C40.2 C41.2 C42.2 C43.2 C44.2 C45.2 FB1.2 U1.F1 U1.F12 U1.G4 U1.G9 U1.T9 U1.U1 U1.U12 | length 28.2
  [1] Signal HS-H w0.09: C40.2@23.012,43.982 C39.2@23.607,43.982 ; v1@32.487,44.044 33.106,44.044 C37.2@33.142,44.008
  [1] Signal HS-H w0.1: v1(32.5,36.749) 32.502,36.751 32.794,36.751 32.829,36.716 C45.2@33.148,36.716 33.148,37.334 C43.2@33.132,37.351 33.35,37.569 33.35,43.383 FB1.2@33.925,43.958 ; C37.2@33.142,44.008 33.894,44.008 FB1.2@33.925,44.04 ; C41.2@33.925,44.76 FB1.2@33.925,44.04 ; FB1.2@33.934,43.967 FB1.2@33.925,43.958 ; FB1.2@33.925,43.958 FB1.2@33.925,44.04
  [6] POWER w0: v1(23.652,36.898) v1@23.678,36.873
  [6] POWER w0.09: v1@23.678,36.873 23.967,36.873 24.28,37.186 24.943,37.186 25.008,37.251 25.72,37.251 v1@25.921,37.452 ; v1(30.075,43.4) 30.126,43.349 30.39,43.349 30.718,43.021 31.289,43.021 32.165,43.897 32.423,43.897 32.423,43.907 32.487,43.971 v1@32.487,44.044
  [6] POWER w0.1: v1@23.61,36.89 23.004,36.89 v1(22.962,36.932) 22.962,43.337 v1(23.675,44.05)
  [10] Signal HS-V w0.07: U1.G9@30.133,37.55 U1.G9@30.075,37.55 30.397,37.872 31.808,37.872 31.872,37.808 31.907,37.808 32.029,37.686 32.029,37.346 U1.F12@32.475,36.9
  [10] Signal HS-V w0.09: v1(25.857,37.516) 26.041,37.516 U1.G4@26.075,37.55
  other v1: 32.487,43.993
VCC1V8_LPDDR4_B: C82.2 C83.2 C84.2 C85.2 C86.2 C87.2 C88.2 C89.2 C90.2 FB2.2 U2.F1 U2.F12 U2.G4 U2.G9 U2.T4 U2.T9 U2.U1 U2.U12 | length 37.2
  [1] Signal HS-H w0.05: C88.2@42.199,36.748 C86.2@41.504,36.748 41.177,37.075 41.177,39.57 41.651,40.044 41.651,42.601 FB2.2@41.224,43.028 41.224,43.809 C83.2@41.218,43.815 41.221,43.818 v1(42.203,43.818) ; C85.2@51.043,36.817 C84.2@51.613,36.817
  [1] Signal HS-H w0.1: C89.2@51.025,43.971 51.601,44.547 51.601,44.722 C82.2@51.801,44.922
  [6] POWER w0.05: v1(42.203,43.818) 43.069,42.951 44.247,42.951 v1(44.577,43.282) 45.056,43.761 45.056,44.055 45.206,44.204 46.614,44.204 46.622,44.196 47.752,44.196 48.616,43.332 v1(48.616,43.282) 48.895,43.282 49.197,43.583 49.987,43.583 50.02,43.615 50.702,43.615 v1(51.029,43.942) 51.388,43.582 51.388,37.266 51.025,36.903 v1@51.025,36.902 ; v1@42.215,36.728 42.215,36.805 42.545,37.135 42.846,37.135 42.875,37.106 43.533,37.106 43.563,37.135 43.956,37.135 43.956,37.109 44.119,37.109 v1(44.552,37.541) ; v1(44.552,37.541) 44.552,37.497 44.983,37.065 44.983,36.805 45.263,36.525 47.556,36.525 47.679,36.401 47.977,36.401 48.235,36.659 48.235,37.084 48.59,37.44 v1(48.616,37.44)
  other v1: 42.215,36.703 51.025,36.8
VCC3V3_S5: C281.2 C282.2 C283.2 C342.2 D5.A2 R125.2 U14.5 U19.52 U19.53 | length 44.8
  [1] Signal HS-H w0.12: C283.2@36.119,43.815 36.982,43.815 ; U14.5@37.283,43.815 36.982,43.815 ; C281.2@37.567,45.009 C282.2@36.754,45.009 36.754,44.044 36.982,43.815 ; U19.53@61.552,35.659 U19.52@61.902,35.659 62.583,35.659 62.956,36.032 D5.A2@62.956,36.968 63.921,36.968 C342.2@63.957,36.932 R125.2@64.745,36.932
  [3] Signal HS-V w0.12: v1(37.287,43.815) 37.287,45.872 39.552,48.137 48.039,48.137 48.619,48.717 54.915,48.717 55.524,48.108 55.524,43.053 61.595,36.982 v1(63.424,36.982)
VCC5V_SYS: B1.5 C96.1 C233.1 C243.2 C265.2 C266.2 C270.2 C271.2 C272.2 J5.13 J5.15 J5.17 L3.2 R92.2 U4.1 U4.6 U10.12 U10.13 U12.2 U13.5 | length 87.1
  [1] Signal HS-H w0.2: J5.13@4.415,1.397 J5.15@4.915,1.397 J5.17@5.415,1.397 5.413,1.399 5.413,2.715 v5(5.41,2.718) ; U13.5@7.617,37.909 6.774,38.752 6.774,39.403 L3.2@5.855,40.323 5.915,40.323 C272.2@6.672,41.08 C271.2@7.256,41.664 C270.2@7.841,42.248 ; v1(7.938,32.421) 8.603,31.756 8.63,31.756 C266.2@8.966,31.42 ; R92.2@8.306,28.703 8.316,28.703 8.915,29.302 8.915,31.369 C266.2@8.966,31.42 ; U12.2@10.968,31.389 10.953,31.404 9.794,31.404 C265.2@9.779,31.42 C266.2@8.966,31.42
  [6] POWER w0.2: v5(5.41,2.718) 5.41,4.193 4.171,5.432 4.171,28.654 v1(7.938,32.421) ; v1(5.918,40.361) 7.938,38.341 v1(7.938,32.421) ; v1(16.434,45.441) 16.434,41.326 18.313,39.446 v1(18.313,33.528) 17.932,33.147 8.664,33.147 v1(7.938,32.421)
  [10] Signal HS-V w0.09: U10.12@16.03,46.395 U10.13@15.676,46.041 15.719,46.041 16.307,45.454 C233.1@16.422,45.454
  [10] Signal HS-V w0.2: C96.1@6.116,32.855 6.551,32.421 v1(7.938,32.421) 8.158,32.421 8.706,32.969 10.69,32.969 10.808,32.852 U4.1@10.808,32.421 ; B1.5@18.319,34.793 18.339,34.774 C243.2@18.339,33.528
VCC7: C117.2 C120.2 C185.2 C234.2 C267.2 C268.2 C285.2 C286.2 C287.2 C288.2 C289.2 C290.2 C300.2 C301.2 C302.2 C307.2 C308.2 C309.2 C310.2 C311.2 C312.2 C329.2 C330.2 C331.2 C332.2 C333.2 C334.2 C335.2 C336.2 C339.2 J5.19 J5.21 J5.23 J5.25 J5.27 J5.33 L2.2 Q3.2 R16.2 R94.2 R111.1 R130.1 SW1.1 U6.C1 U7.1 U9.1 U10.4 U12.5 U15.D1 U15.D2 U15.E1 U15.E2 U16.D1 U16.D2 U16.E1 U16.E2 U17.3 U18.3 U19.1 U19.8 U19.10 U19.13 U19.16 U19.17 U19.23 U19.24 U19.35 U19.36 U19.44 U19.45 U19.59 U19.60 | length 236.4
  [1] Signal HS-H w0.09: C307.2@58.852,36.703 59.274,37.125 59.274,37.817 59.466,38.01 59.611,38.01
  [1] Signal HS-H w0.12: J5.19@5.915,1.397 J5.21@6.415,1.397 J5.23@6.915,1.397 J5.25@7.415,1.397 J5.27@7.915,1.397 7.915,3.368 8.052,3.505 9.195,3.505 ; v1(9.347,4.14) 9.347,3.658 9.195,3.505 ; J5.33@9.415,1.397 9.398,1.414 9.398,3.435 9.328,3.505 9.195,3.505 ; v1(14.732,30.277) 14.554,30.099 14.275,30.099 14.265,30.089 U12.5@13.568,30.089 13.549,30.089 13.384,29.924 L2.2@13.384,27.94 C267.2@14.783,27.94 C268.2@15.596,27.94 17.399,27.94 v1(19.456,25.883) ; U9.1@23.601,19.615 23.628,19.615 24.322,18.921 C185.2@24.35,18.921 ; v3(54.585,29.515) 54.604,29.515 54.863,29.774 U19.16@55.667,29.774 56.002,29.774 56.08,29.852 56.152,29.852 56.274,29.974 56.274,30.624 56.099,30.799 55.692,30.799 U19.13@55.667,30.824 56.002,30.824 56.08,30.902 56.152,30.902 56.312,31.062 56.312,31.635 56.152,31.796 56.08,31.796 U19.10@56.002,31.874 ; v3(54.61,32.766) 54.686,32.766 54.878,32.574 U19.8@55.667,32.574 ; C329.2@54.61,35.839 55.27,35.839 55.667,35.443 U19.1@55.667,35.024 U19.1@56.002,35.024 ; v3(54.635,31.953) 54.711,31.953 54.791,31.874 U19.10@55.667,31.874 U19.10@56.002,31.874 ; C311.2@54.991,27.635 55.074,27.718 C334.2@55.074,28.651 55.575,28.651 55.667,28.743 U19.17@55.667,29.424 57.824,29.424 57.974,29.274 57.974,29.202 58.052,29.124 U19.23@58.052,28.789 58.052,28.13 v3(57.683,27.762) ; v3(58.598,27.661) 58.598,27.736 58.402,27.933 U19.24@58.402,28.789 58.427,28.814 58.427,29.221 58.63,29.424 U19.35@62.537,29.424 62.872,29.424 63.279,29.016 63.412,29.016 63.652,28.776 C309.2@63.652,28.626 63.652,28.476 63.892,28.236 64.45,28.236 64.697,27.989 65.452,27.989 65.782,28.318 v3(67.453,28.318) ; C307.2@59.03,36.83 58.903,36.703 59.102,36.504 U19.60@59.102,35.659 59.077,35.634 59.077,35.227 58.874,35.024 U19.1@56.002,35.024 ; 59.611,38.01 59.995,38.394 v5(59.995,41.451) ; C308.2@59.715,36.703 59.452,36.439 U19.59@59.452,35.659 59.452,35.324 59.53,35.246 59.53,35.174 59.676,35.027 61.753,35.027 61.9,34.88 61.9,33.153 62.052,33.002 62.124,33.002 62.202,32.924 U19.45@62.537,32.924 63.325,32.924 63.652,33.251 C310.2@63.652,33.401 ; C336.2@63.576,29.642 63.444,29.774 U19.36@62.537,29.774 62.202,29.774 62.124,29.852 62.052,29.852 61.93,29.974 61.93,32.374 62.105,32.549 62.512,32.549 U19.44@62.537,32.574 63.387,32.574 C339.2@63.576,32.385 64.013,31.948 65.044,31.948 v1(65.811,32.715) ; U19.8@55.667,32.574 56.002,32.574 56.08,32.652 56.152,32.652 56.286,32.787 56.286,34.811 56.152,34.946 56.08,34.946 U19.1@56.002,35.024 ; U19.8@55.667,32.574 55.692,32.549 56.123,32.549 56.312,32.36 56.312,32.112 56.152,31.952 56.08,31.952 U19.10@56.002,31.874
  [6] POWER w0.12: v1(9.347,4.14) 9.83,4.14 10.287,4.597 11.811,6.121 22.644,6.121 v1(22.963,5.802) 23.009,5.848 31.705,5.848 v1(31.75,5.893) ; v1(11.354,14.122) 18.999,14.122 19.431,14.554 v1(19.431,17.348) ; v1(12.901,48.11) 13.156,48.364 23.243,48.364 ; v1(14.732,30.277) 18.593,30.277 21.252,32.936 21.252,46.373 23.243,48.364 ; v1(19.456,25.883) 19.837,25.502 19.837,17.755 v1(19.431,17.348) ; v1(24.359,18.923) 22.784,17.348 v1(19.431,17.348) ; v5(59.995,41.451) 60.02,41.476 60.02,46.685 57.261,49.444 50.663,49.444 49.708,48.489 23.368,48.489 23.243,48.364
  [10] Signal HS-V w0.12: v1(9.347,4.14) 9.347,7.924 11.633,10.21 11.633,13.104 11.388,13.349 11.388,14.066 11.367,14.088 10.616,13.337 U6.C1@10.594,13.337 ; C234.2@12.901,48.137 v1(12.901,48.11) U10.4@13.555,47.456 ; U7.1@17.297,17.577 18.207,17.577 C117.2@18.694,17.089 19.172,17.089 v1(19.431,17.348) ; U17.3@19.98,26.446 19.452,25.918 C301.2@19.444,25.918 19.444,25.899 C300.2@20.018,25.324 C300.2@20.018,25.056 ; U15.E2@22.028,6.701 22.028,5.823 C287.2@22.049,5.802 ; U15.D2@22.028,7.101 U15.D1@22.428,7.101 23.344,7.101 C286.2@23.357,7.114 ; U15.E1@22.428,6.701 22.738,6.701 22.963,6.475 v1(22.963,5.802) ; v1(31.75,5.893) 31.772,5.914 U16.E2@31.772,6.839 ; U16.D2@31.772,7.239 U16.D1@32.172,7.239 33.071,7.239 C290.2@33.096,7.264 ; U16.E1@32.172,6.839 32.614,6.397 C289.2@32.614,5.893 ; R111.1@63.957,24.232 64.542,24.232 64.786,24.475 Q3.2@65.111,24.475 66.004,24.475 67.453,25.924 v3(67.453,28.318)
VCC_CENTER: C103.2 C104.2 C108.2 C109.2 C111.2 C112.2 C113.2 C114.2 U8.M11 U8.M12 U8.M13 U8.M14 U8.M15 U8.N11 U8.N12 U8.P13 U8.P14 U8.P15 | length 6.1
  [6] POWER w0.09: v1(38.98,23.675) v1(38.52,24.135) v1(38.061,24.594) 38.077,24.611 38.077,25.518 v1(38.094,25.534) 38.094,25.545 37.649,25.99 v1(37.649,26.001) 37.649,26.011 38.061,26.423 v1(38.061,26.433) v1(38.52,25.973) 38.533,25.973 38.967,25.539 v1(38.98,25.539) 38.98,25.526 39.439,25.066 v1(39.439,25.054) v1@39.899,24.594
  other v1: 39.772,24.67
VCC_CPU_B: C146.2 C154.2 C155.2 C156.2 C157.2 C158.2 C159.2 U8.K19 U8.K21 U8.L18 U8.L19 U8.L21 U8.L23 U8.M18 U8.M19 U8.M20 U8.M21 U8.M22 U8.N20 U8.N22 | length 9
  [1] Signal HS-H w0.1: U8.N20@41.737,21.836 v1(42.197,22.296) ; v1(42.197,23.215) U8.K19@42.657,23.675 ; v1(42.657,20.917) U8.M22@43.116,21.377
  [6] POWER w0.1: v1(42.197,23.215) 41.737,23.675 41.278,23.215 v1(41.737,22.756) v1(42.197,22.296) v1@42.657,21.836 ; v1(43.576,22.756) v1(43.116,22.296) v1@42.657,21.836 ; v1(44.036,21.377) 43.493,21.377 43.033,20.917 v1(42.657,20.917) v1@42.657,21.836
  other v1: 42.733,21.913 41.354,23.164 41.788,23.624
VCC_CPU_L: C116.2 C118.2 C122.2 C123.2 C124.2 C125.2 C126.2 U8.P20 U8.P22 U8.R19 U8.R20 U8.R22 U8.T20 U8.T22 | length 4.9
  [6] POWER w0.1: v1(40.359,21.377) v1(40.359,20.458) ; v1(41.278,21.377) v1(40.818,20.917) v1(40.359,20.458) ; v1(42.197,20.458) v1(41.737,19.998) v1(41.278,19.538) 41.024,19.792 40.812,19.792 40.408,20.195 40.408,20.408 v1(40.359,20.458)
VCC_DDR: C1.2 C2.2 C3.2 C5.2 C6.2 C7.2 C8.2 C9.2 C10.2 C19.2 C20.2 C21.2 C22.2 C23.2 C24.2 C25.2 C26.2 C27.2 C46.2 C47.2 C48.2 C49.2 C50.2 C51.2 C52.2 C53.2 C54.2 C64.2 C65.2 C66.2 C67.2 C68.2 C69.2 C70.2 C71.2 C72.2 C160.2 C161.2 C162.2 C163.2 C164.2 C165.2 C166.2 C167.2 C168.2 C169.2 C170.2 C171.2 C172.2 C173.2 C174.2 C175.2 C176.2 C177.2 C317.2 C321.2 FB1.1 FB2.1 FB4.2 FB6.2 L10.2 Q5.3 R122.2 U1.A4 U1.A9 U1.AB4 U1.AB9 U1.F5 U1.F8 U1.H1 U1.H5 U1.H8 U1.H12 U1.K1 U1.K3 U1.K10 U1.K12 U1.N1 U1.N3 U1.N10 U1.N12 U1.R1 U1.R5 U1.R8 U1.R12 U1.U5 U1.U8 U2.A4 U2.A9 U2.AB4 U2.AB9 U2.F5 U2.F8 U2.H1 U2.H5 U2.H8 U2.H12 U2.K1 U2.K3 U2.K10 U2.K12 U2.N1 U2.N3 U2.N10 U2.N12 U2.R1 U2.R5 U2.R8 U2.R12 U2.U5 U2.U8 U8.J11 U8.J12 U8.J13 U8.J14 U8.J15 U8.J16 U8.J17 U8.J18 U8.K11 U8.K13 U8.K15 U8.K17 U8.L9 U8.L10 U8.M9 U8.N9 U8.N10 U8.P9 U8.R9 U8.R10 U8.T9 U8.U9 U8.U10 U8.V9 | length 207.1
  [1] Signal HS-H w0.12: v1(34.843,25.054) U8.T9@35.303,25.513 U8.R9@35.762,25.973 ; U8.R10@36.222,25.513 U8.R9@35.762,25.973 ; v1(36.222,26.433) U8.R9@35.762,25.973 ; v1(37.601,27.811) U8.L10@38.061,27.352 ; U8.K13@39.899,26.433 U8.J13@40.359,26.892 ; U8.J12@39.899,27.352 U8.J13@40.359,26.892 ; U8.K15@40.818,25.513 U8.J15@41.278,25.973 ; U8.J16@41.737,25.513 U8.J15@41.278,25.973 ; v1(42.197,25.054) U8.J18@42.657,24.594 ; U8.J13@40.359,26.892 U8.J14@40.818,26.433 U8.J15@41.278,25.973
  [6] POWER w0.12: v8(22.479,34.087) 23.673,32.893 v1(25.445,32.893) 25.47,32.868 29.005,32.868 29.635,33.498 v1@30.075,33.498 ; v1(23.673,39.516) 23.698,39.492 25.248,39.492 v1(25.273,39.467) 26.827,39.467 27.102,39.192 27.102,38.603 26.873,38.375 v1(26.873,38.323) ; v1(23.675,42.75) 23.281,42.356 23.281,41.768 v1(23.673,41.377) 23.684,41.388 25.289,41.388 v1(25.3,41.399) 28.039,41.399 v1(29.286,42.647) 29.261,42.672 26.899,42.672 v1(26.873,42.697) ; v1(26.06,47.447) 26.06,47.809 26.181,47.93 29.515,47.93 30.042,47.402 30.112,47.402 30.938,48.229 44.253,48.229 44.625,47.856 v1(44.625,47.276) 45.431,48.082 48.184,48.082 48.616,47.65 v1(48.616,47.295) ; v1@26.81,44.05 26.81,43.985 26.539,43.714 26.539,43.18 v1@26.899,42.82 ; v1(26.873,36.978) 26.854,36.978 26.479,37.353 26.479,37.929 v1(26.873,38.323) ; v1@26.911,42.646 v1@26.923,42.646 ; v1@29.271,36.894 29.297,36.894 29.68,37.276 29.68,37.679 29.434,37.925 29.358,37.925 28.96,38.323 v1(26.873,38.323) ; v1@29.273,42.761 28.918,43.117 28.918,43.675 v1@29.312,44.069 ; v1@29.337,42.697 29.655,42.38 29.655,41.949 29.91,41.694 30.61,41.694 30.853,41.45 v1(30.875,41.45) 30.9,41.425 32.45,41.425 32.475,41.399 32.944,41.868 32.944,42.393 v1@32.536,42.801 ; v1@29.582,38.412 29.582,38.523 29.705,38.646 29.705,39 30.253,39.548 v1(30.886,39.548) 31.242,39.903 32.1,39.903 32.43,39.573 v1(32.487,39.573) 32.649,39.411 ; v1@32.475,42.801 v1@32.536,42.801 ; v1(32.487,38.329) 32.529,38.329 32.881,38.681 32.881,39.122 32.62,39.383 ; 32.625,39.387 42.025,39.387 ; v1@35.267,24.681 v1(35.318,24.681) v1@35.274,24.637 ; v1(39.49,27.862) 39.987,28.359 39.987,28.936 43.461,32.41 43.993,32.41 44.556,32.974 44.556,33.253 44.602,33.299 45.285,32.617 45.285,32.543 45.95,31.877 v1(48.59,31.877) 50.673,31.877 52.012,33.216 52.012,39.439 v8(52.019,39.446) 53.34,40.767 v1(64.956,40.767) ; v1(42.215,42.524) 41.88,42.189 ; v1@42.24,38.151 41.821,38.57 41.821,39.052 v1(42.215,39.446) 42.52,39.751 43.51,39.751 v1(43.815,39.446) 43.861,39.492 44.167,39.492 44.528,39.853 45.447,39.853 45.717,39.582 ; v1@45.415,36.881 45.021,37.275 45.021,37.757 v1@45.415,38.151 ; v1@45.415,43.972 45.822,43.566 45.822,42.982 v1@45.451,42.611 ; v1@47.808,38.136 45.43,38.136 v1@45.415,38.151 ; v1(47.822,38.148) 47.428,37.754 47.428,37.16 v1(47.828,36.76) ; v1(51.029,39.415) 50.464,39.98 49.826,39.98 v1(49.428,39.582) 45.717,39.582 ; v1(51.029,42.596) 50.635,42.202 50.635,41.694 v1(51.029,41.3) 50.685,40.957 49.797,40.957 v1(49.403,41.351) 48.997,41.758 48.997,42.215 48.87,42.342 48.133,42.342 47.828,42.647 47.793,42.611 v1@45.451,42.611 ; v1@32.536,42.801 33.606,42.801 v1(33.96,43.155) 40.259,43.155 v1(41.224,42.189) 41.88,42.189 ; 41.88,42.189 41.824,42.134 41.824,41.64 v1(42.189,41.275) 42.52,40.945 43.623,40.945 43.775,41.097 v1(43.84,41.097) 45.339,41.097 45.819,41.577 45.819,42.171 v1(45.415,42.575) v1@45.451,42.611 ; v1@45.415,38.151 45.835,38.57 45.835,39.465 45.717,39.582
  [10] Signal HS-V w0.12: v8@22.517,34.087 22.517,37.274 23.438,38.196 23.671,38.196 U1.H1@23.675,38.2 23.279,38.596 23.279,39.357 23.384,39.462 23.637,39.462 U1.K1@23.675,39.5 ; v1(25.445,32.893) 25.883,32.893 26.075,33.085 U1.A4@26.075,33.65 ; C162.2@34.047,24.444 34.047,24.46 C161.2@34.615,25.028 ; v1(35.318,24.681) 35.216,24.681 v1(34.843,25.054) 34.818,25.028 C161.2@34.615,25.028 ; C171.2@35.873,27.132 35.885,27.132 36.246,26.771 C164.2@36.246,26.492 ; v1(37.141,27.352) 37.444,27.655 FB4.2@37.444,27.811 ; C165.2@37.246,26.551 37.023,26.551 v1(36.682,26.892) 36.281,26.492 C164.2@36.246,26.492 ; C169.2@38.482,29.05 38.471,29.05 C170.2@37.905,28.484 37.444,28.024 FB4.2@37.444,27.827 37.953,27.827 38.126,27.654 38.126,27.648 38.417,27.357 C168.2@39.016,27.357 39.016,27.392 C167.2@39.607,27.983 39.804,27.983 FB6.2@40.242,27.545 40.486,27.545 C172.2@40.963,27.068 41.053,27.068 C173.2@41.586,26.535 42.154,26.535 C175.2@42.459,26.23 41.916,25.687 C174.2@41.916,25.668 41.916,25.4 42.197,25.118 v1(42.197,25.054) ; v1(41.737,24.594) v1(42.197,25.054) ; C177.2@43.272,24.706 42.924,25.054 v1(42.197,25.054) ; v1@44.625,33.202 U2.AB9@44.625,33.55 ; U2.H5@47.825,42.65 47.434,43.041 47.434,43.559 U2.F5@47.825,43.95 ; C317.2@48.616,31.902 48.625,31.912 U2.AB4@48.625,33.55 ; U2.R1@51.025,38.1 52.016,39.091 52.016,39.403 51.996,39.423 51.048,39.423 U2.N1@51.025,39.4 ; C321.2@60.579,37.389 61.009,37.389 61.087,37.467 R122.2@61.087,38.075 61.877,38.075 L10.2@62.258,37.694 63.17,37.694 63.631,38.154 63.631,38.967 64.414,39.751 64.846,39.751 64.956,39.86 v1(64.956,40.767) ; C161.2@34.615,25.028 34.615,25.574 C163.2@34.906,25.865 35.175,25.865 35.349,26.039 35.466,26.039 35.697,26.269 35.755,26.269 35.977,26.492 C164.2@36.246,26.492
  other v1: 34.282,24.594 41.763,25.539 37.167,26.458 38.98,27.301 44.704,33.299 30.024,33.498 45.466,36.906 29.271,36.919 42.291,38.049 45.415,38.125 29.46,38.285 32.627,41.425 32.475,42.674 47.828,42.697 45.415,43.845 29.286,43.993 26.875,44.101 30.099,47.402